# Altium PCB SUPERPID.PcbDoc
Units mil, origin at the board's own origin, x right, y up, seen from the top; angles counter-clockwise.
Board outline 3937.01 x 3543.31 mil, 2 copper layers (Top Layer, Bottom Layer), stack 62.249 mil thick; 50 components, 47 nets, 184 pads, 22 vias.
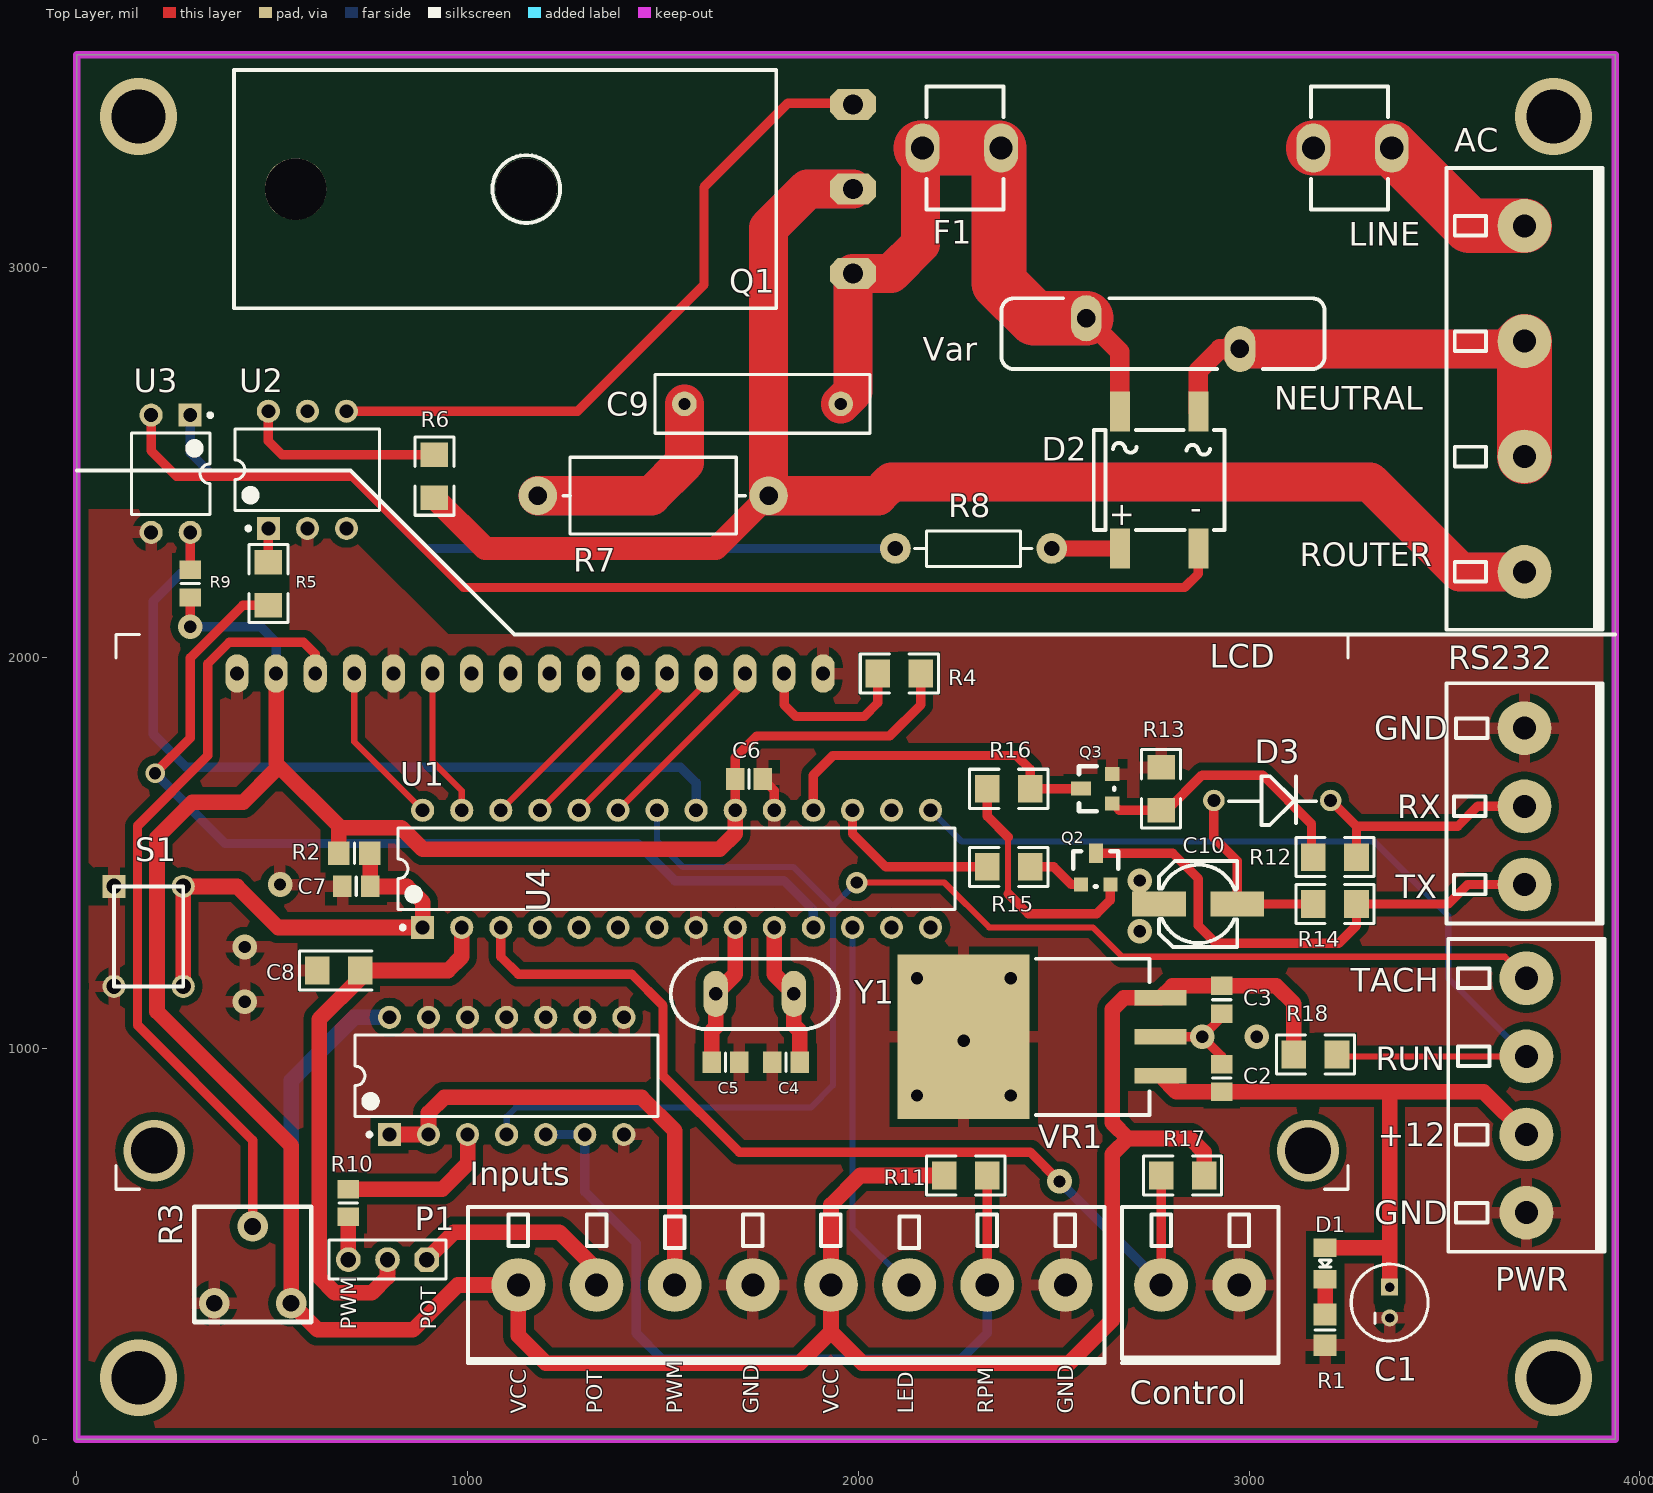
[diagram p0: Top Layer view]
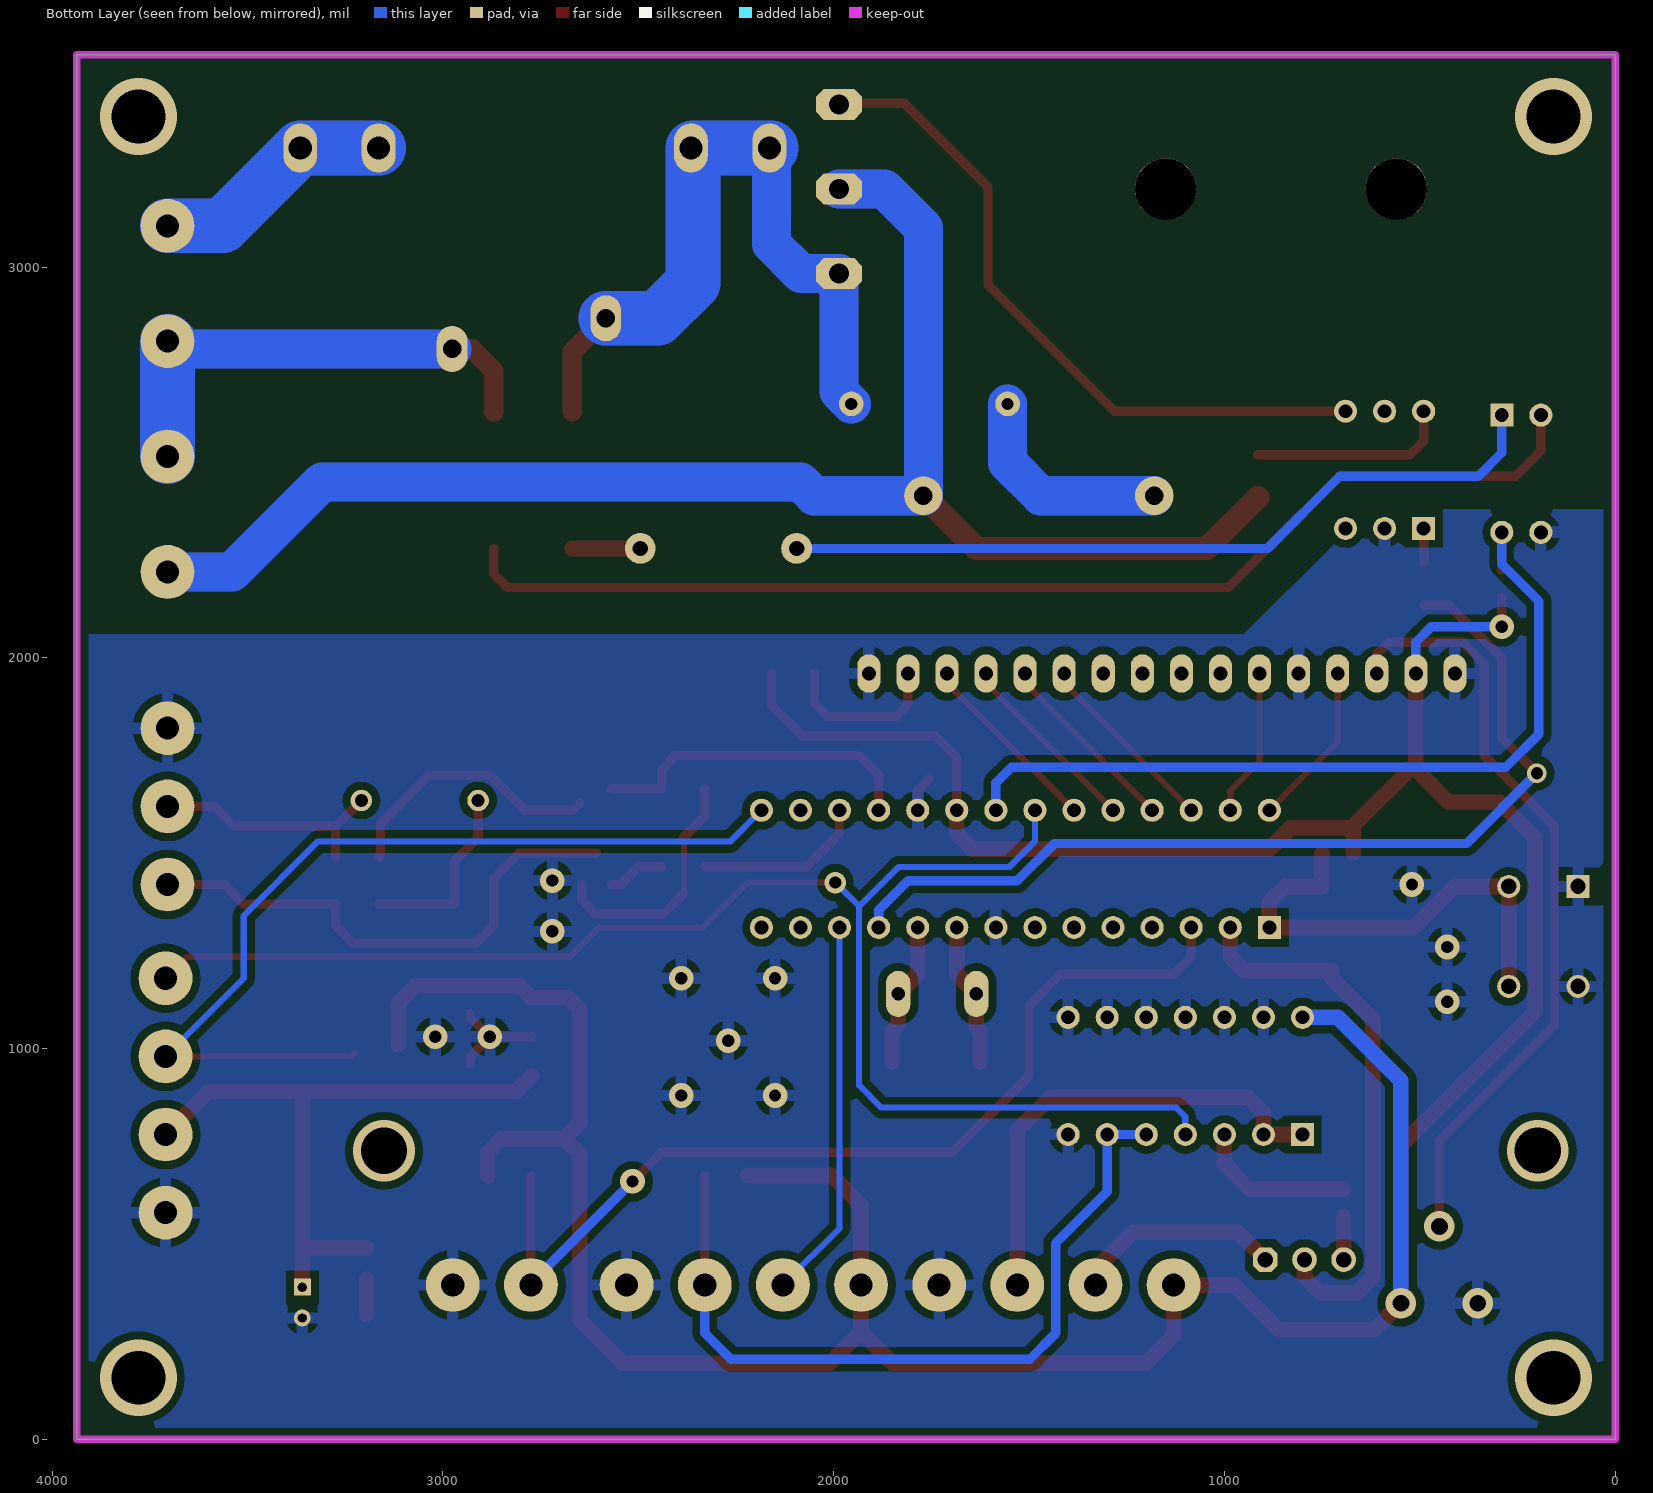
[diagram p1: Bottom Layer view, seen from below]

## Layer stack, top to bottom
Top Layer: signal copper 1.4
Dielectric: core 59.4488, FR-4, Dk 4.8
Bottom Layer: signal copper 1.4

## Board outline
0,0 0,3543.31 3937.01,3543.31 3937.01,0

## Design rules (kind name [scope] priority, off if disabled: settings)
Clearance POL [InPolygon] p1: gap=20
Clearance [All] p2: gap=10
PolygonConnect [All] p1: connectstyle=Relief reliefconductorwidth=30 reliefentries=4 polygonreliefangle="90 Angle"
RoutingVias [All] p1: holewidth=39.37 width=62.99 viastyle="Through Hole" minholewidth=31.5 minwidth=47.24 maxholewidth=47.24 maxwidth=78.74
SilkscreenOverComponentPads [All] p1: minsilkscreentomaskgap=10
SolderMaskExpansion [All] p1: expansion=4
Width [All] p1: maxlimit=140 minlimit=16 preferedwidth=24 minimp=50.000000 maximp=50.000000 favimp=50.000000
27 further rules are at their usual default settings.

## Classes and differential pairs
component class SUPERPID: C1 C2 C3 C4 C5 C6 C7 C8 C10 Control D1 D3 Inputs LCD P1 PWR Q2 Q3 R1 R2 R3 R4 R10 R11 R12 R13 R14 R15 R16 R17 R18 RS232 S1 U1 U4 VR1 Y1
component class POTENCIA: AC C9 D2 F1 Q1 R5 R6 R7 R8 R9 U2 U3 Var

## Components (designator, comment, footprint, x,y, rotation, side; value= is the part's Value field where it differs from the comment)
AC "Block 4" BOR-4-7.5 3705,2220 r90 top
C1 "100uF" "RADIAL CAPACITOR - 100uF - 10V" 3360,350 r90 top
C2 "100nF" 6-0805_N 2930,925 r90 top
C3 "100nF" 6-0805_N 2930,1125 r90 top
C4 "15pF" 6-0805_N 1815,965 r180 top
C5 "15pF" 6-0805_N 1660,965 r0 top
C6 "100nF" 6-0805_N 1720,1690 r0 top
C7 "100nF" 6-0805_N 715,1415 r180 top
C8 "10uF" CC3216-1206 670,1200 r180 top
C9 "100nF 400V" RAD-0.4 1755,2650 r180 top
C10 "Cap Pol1" "CONDENSADOR SMT" 2870,1370 r0 top
Control "Block 2" BOR-2 2875,395 r0 top
D1 "Red" "0805 LED RED" 3195,450 r270 top
D2 "Bridge1" DF1502S-T 2770,2455 r180 top
D3 "1N4148" Diodo 3060,1635 r0 top
F1 "10A" "FUSE HOLDER" 2765,3305 r0 top
Inputs "Block 8" BOR-8-5.08 1130,395 r0 top
LCD "LCD" "LCD 16X2" 100,640 r0 top
P1 "Jumper3" HDR1X3 895,460 r180 top
PWR "Block 4" BOR-4-5.08 3710,580 r90 top
Q1 "BTA41600B" "TOP3 SINKED" 1790,3200 r90 top
Q2 "2N2907" "SOT-23 - PNP" 2570,1420 r0 top
Q3 "2N2222" SOT-23 2610,1665 r90 top
R1 "2k" 6-0805_M 3195,280 r90 top
R2 "10k" 6-0805_M 710,1500 r180 top
R3 "10K" TRIMPOT 450,545 r0 top
R4 "330R" CR3216-1206 2105,1960 r0 top
R5 "330R" CR3216-1206 490,2190 r90 top
R6 "1k" CR3216-1206 915,2465 r270 top
R7 "39R 1W" "AXIAL- 1W" 1475,2415 r0 top
R8 "22k" AXIAL-0.4 2295,2280 r0 top
R9 "10K" 6-0805_N 290,2190 r270 top
R10 "10K" 6-0805_N 695,605 r270 top
R11 "22k" CR3216-1206 2275,675 r0 top
R12 "10K" CR3216-1206 3220,1490 r0 top
R13 "10K" CR3216-1206 2775,1665 r90 top
R14 "10K" CR3216-1206 3220,1370 r180 top
R15 "10K" CR3216-1206 2385,1465 r180 top
R16 "10K" CR3216-1206 2385,1665 r180 top
R17 "10K" CR3216-1206 2830,675 r0 top
R18 "10K" CR3216-1206 3170,985 r180 top
RS232 "Molex 3" BOR-3 3705,1420 r90 top
S1 "BUTTON" "Switch - Omron" 95,1415 r270 top
U1 "PIC18F2550-I/SP" SPDIP300-SP28 1535,1460 r90 top
U2 "MOC3021" DIP-6 590,2481.3 r90 top
U3 "Optoisolator1" DIP-4 240,2471.3 r270 top
U4 "CD4081BCN" N14A 1100,930 r90 top
Var "300V" S20K115 2780,2830 r270 top
VR1 "Volt Reg" TO263-3-TD 2545,1030 r90 top
Y1 "XTAL 20MHZ" XTAL-2 1635,1140 r0 top

## Footprints (in the part's own frame and the unit in brackets; to place one, negate y for a bottom-side part, rotate by r counter-clockwise, add the part's x,y. Pads: shape width x height; smd on the part's side, far side on the other; paste and mask are expansions set on the pad)
6-0805_M [mm] "Chip Resistor, Body 2.0x1.2mm, IPC Low Density"
  rect 1.4x1.5 smd: 1(-1,0) 2(1,0)
  silkscreen extent 0,-0.65 0,0.65, body extent -1.07,-0.7 1.07,0.7, height 0.7
6-0805_N [mm] "Chip Resistor, Body 2.0x1.2mm, IPC Medium Density"
  rect 1.2x1.4 smd: 1(-0.9,0) 2(0.9,0)
  silkscreen extent 0,-0.6 0,0.6, body extent -1.07,-0.7 1.07,0.7, height 0.7
"0805 LED RED" [mm] "LED 0805 RED"
  rect 1.2x1.5 smd: 1(-1.016,0) 2(1.016,0)
  silkscreen extent -0.23,-0.38 0.23,0.38, body extent -1.01,-0.62 1.01,0.63, height 1.15
AXIAL-0.4 [mm] "Resistor; 2 Leads"
  round 2 hole 1: 1(-5.08,0) 2(5.08,0)
  silkscreen extent -3.84,-1.17 3.78,1.14, body extent -5.38,-1.14 5.38,1.17, height 2.93
"AXIAL- 1W" [mm] "Resistor; 2 Leads"
  round 2.5 hole 1.2: 1(-7.5,0) 2(7.5,0)
  silkscreen extent -5.84,-2.5 5.97,2.5, body extent -7.98,-2.21 7.72,2.29, height 4.75
BOR-2 [mm]
  round 3.5 hole 1.5: 1(-2.54,0) 2(2.54,0)
  silkscreen extent -5.08,-5.08 5.08,5.08, body extent -5.46,-3.81 5.04,3.89, height 10
BOR-3 [mm]
  round 3.5 hole 1.5: 1(0,0) 2(5.08,0) 3(10.16,0)
  silkscreen extent -2.54,-5.08 13.08,5.08, body extent -2.92,-3.81 12.58,3.89, height 10.05
BOR-4-5.08 [mm]
  round 3.5 hole 1.5: 1(0,0) 2(5.08,0) 3(10.16,0) 4(15.24,0)
  silkscreen extent -2.54,-5.08 17.78,5.08, body extent -3.1,-4.04 17.79,4.06, height 10
BOR-4-7.5 [mm]
  round 3.5 hole 1.5: 1(0,0) 2(7.5,0) 3(15,0) 4(22.5,0)
  silkscreen extent -3.76,-5.08 26.25,5.08, body extent -3.76,-4.5 26.24,4.5, height 13.65
BOR-8-5.08 [mm]
  round 3.5 hole 1.5: 1(0,0) 2(5.08,0) 3(10.16,0) 4(15.24,0) 5(20.32,0) 6(25.4,0) 7(30.48,0) 8(35.56,0)
  silkscreen extent -3.28,-5.08 38.1,5.08, body extent -3.29,-4.59 38.09,5.21, height 14.2
CC3216-1206 [mm] "Chip Capacitor; Body 3.2 x 1.6 mm (LxW typ)"
  rect 1.6x1.8 smd: 1(-1.4,0) 2(1.4,0)
  silkscreen extent -2.16,-1.27 2.54,1.27, body extent -2.16,-0.89 2.04,0.91, height 0.95
"CONDENSADOR SMT" [mm]
  rect 3.5x1.626 smd: 1(-2.54,0) 2(2.54,0)
  silkscreen extent -2.54,-2.79 2.54,2.79, body extent -3.56,-3.17 3.44,3.43, height 5.4
CR3216-1206 [mm] "Chip Resistor; Body 3.2 x 1.6 mm (LxW typ)"
  rect 1.6x1.8 smd: 1(-1.4,0) 2(1.4,0)
  silkscreen extent -2.54,-1.27 2.54,1.27, body extent -1.6,-0.76 1.6,0.84, height 1
DF1502S-T [mm]
  rect 1.3x2.6 smd: 1(2.55,4.45) 2(-2.55,-4.45) 3(-2.55,4.45) 4(2.55,-4.45)
  silkscreen extent -4.25,-3.25 4.25,3.25, body extent -4.28,-4.77 4.22,5.23, height 3.63
Diodo [mm] "Axial Device, Thru-Hole; 2 Leads; 0.4 in Pin Spacing"
  round 1.4 hole 0.85: 1(-3.81,0) 2(3.785,0)
  silkscreen extent -2.82,-1.6 2.82,1.57, body extent -4.22,-1.37 4.19,1.3, height 2.83
DIP-4 [mm] "DIP; 4 Leads; Row Spacing 7.62 mm; Pitch 2.54 mm"
  rect 1.5x1.5 hole 0.9: 1(-3.81,1.27)
  round 1.5 hole 0.9: 2(-3.81,-1.27) 3(3.81,-1.27) 4(3.81,1.27)
  silkscreen extent -3.93,-2.55 2.65,2.7, body extent -4,-2.74 4,2.8, height 4.31
DIP-6 [mm] "DIP; 6 Leads; Row Spacing 7.62 mm; Pitch 2.54 mm"
  rect 1.5x1.5 hole 0.9: 1(-3.81,2.54)
  round 1.5 hole 0.9: 2(-3.81,0) 3(-3.81,-2.54) 4(3.81,-2.54) 5(3.81,0) 6(3.81,2.54)
  silkscreen extent -3.93,-4.7 2.65,4.7, body extent -4,-4.04 4,4.04, height 4.31
"FUSE HOLDER" [mm]
  oval 2.2x3.2 hole 1.5: 1(-15.248,0) 1(-10.152,0) 2(10.152,0) 2(15.248,0)
  silkscreen extent -15,-4 15,4, body extent -15.44,-2.95 15.44,2.95, height 8.84
HDR1X3 [mm]
  oct 1.6x1.6 hole 1: 1(0,0)
  round 1.6 hole 1: 2(2.54,0) 3(5.08,0)
  silkscreen extent -1.27,-1.27 6.35,1.27, body extent -1.21,-1.24 6.29,1.26, height 16.31
"LCD 16X2" [mm]
  oval 1.5x2.5 hole 0.9: 1(7.874,33.528) 2(10.414,33.528) 3(12.954,33.528) 4(15.494,33.528) 5(18.034,33.528) 6(20.574,33.528) 7(23.114,33.528) 8(25.654,33.528) 9(28.194,33.528) 10(30.734,33.528) 11(33.274,33.528) 12(35.814,33.528) 13(38.354,33.528) 14(40.894,33.528) 15(43.434,33.528) 16(45.974,33.528)
  silkscreen extent 0,0 80.09,36.07, body extent -0.13,0.03 79.87,36.03, height 20.85
N14A [mm] "DIP, 14-Leads, Row Spacing 7.62mm, Pitch 2.54mm, Body 19.18x6.35mm"
  rect 1.5x1.5 hole 0.9: 1(-3.81,7.62)
  round 1.5 hole 0.9: 2(-3.81,5.08) 3(-3.81,2.54) 4(-3.81,0) 5(-3.81,-2.54) 6(-3.81,-5.08) 7(-3.81,-7.62) 8(3.81,-7.62) 9(3.81,-5.08) 10(3.81,-2.54) 11(3.81,0) 12(3.81,2.54) 13(3.81,5.08) 14(3.81,7.62)
  silkscreen extent -3.93,-9.85 2.65,9.85, body extent -3.55,-9.85 3.55,9.85, height 5.08
RAD-0.4 [mm] "Radial Cap, Thru-Hole; 2 Leads; 0.4 in Pin Spacing"
  round 1.6 hole 0.8: 1(-5.08,0) 2(5.08,0)
  silkscreen extent -6.98,-1.91 6.98,1.91
"RADIAL CAPACITOR - 100uF - 10V" [mm]
  rect 1.1x1.1 hole 0.6: 1(1,0)
  round 1.1 hole 0.6: 2(-1,0)
  silkscreen extent -2.5,-2.5 2.5,2.5, body extent -2.5,-2.5 2.5,2.5, height 11
S20K115 [mm] "SIOV metal oxide varistors  Leaded varistors, StandarD series"
  oval 3x2 hole 1.2: 1(-1,-5) 2(1,5)
  silkscreen extent -2.3,-10.5 2.3,10.5, body extent -1.75,-10 1.75,10, height 24.75
SOT-23 [mil]
  rect 36x36 smd: B(-37.5,-40) E(37.5,-40)
  rect 36x50 smd: C(0.5,40)
  silkscreen extent -58,-45 58,45, body extent -57,-46 57,46, height 41
"SOT-23 - PNP" [mil]
  rect 36x36 smd: B(0,0) E(75,0)
  rect 36x50 smd: C(38,80)
  silkscreen extent -20,-5 95,85
SPDIP300-SP28 [mm] "DIP, 28-Leads, Row Spacing 7.62mm, Pitch 2.54mm, Body 34.9x6.8mm"
  rect 1.5x1.5 hole 0.9: 1(-3.81,16.51)
  round 1.5 hole 0.9: 2(-3.81,13.97) 3(-3.81,11.43) 4(-3.81,8.89) 5(-3.81,6.35) 6(-3.81,3.81) 7(-3.81,1.27) 8(-3.81,-1.27) 9(-3.81,-3.81) 10(-3.81,-6.35) 11(-3.81,-8.89) 12(-3.81,-11.43) 13(-3.81,-13.97) 14(-3.81,-16.51) 15(3.81,-16.51) 16(3.81,-13.97) 17(3.81,-11.43) 18(3.81,-8.89) 19(3.81,-6.35) 20(3.81,-3.81) 21(3.81,-1.27) 22(3.81,1.27) 23(3.81,3.81) 24(3.81,6.35) 25(3.81,8.89) 26(3.81,11.43) 27(3.81,13.97) 28(3.81,16.51)
  silkscreen extent -3.93,-18.1 2.65,18.1, body extent -3.55,-18.1 3.55,18.1, height 5.08
"Switch - Omron" [mm]
  rect 1.5x1.5 hole 1: 1(0,0)
  round 1.5 hole 1: 1(6.5,0) 2(0,4.5) 2(6.5,4.5)
  silkscreen extent 0,0 6.5,4.5, body extent -0.93,-0.76 7.28,5.24, height 9.5
TO263-3-TD [mm]
  rect 1x3.4 smd: 1(-2.54,-5.8) 2(0,-5.8) 3(2.54,-5.8)
  rect 10.7x8.6 smd: 2(0,7)
  silkscreen extent -5.08,-5.08 5.08,2.29, body extent -5,-4.99 5,10.68, height 4.88
"TOP3 SINKED" [mm]
  round 4 hole 4: 0(0,31.25) 0(0,16.25)
  oct 2x3 hole 1.3: 1(-5.5,-5) 2(0,-5) 3(5.5,-5)
  silkscreen extent -7.75,0 7.75,35.25, body extent -8,-5.35 32,35.27, height 7.68
TRIMPOT [mm]
  round 2 hole 1.1: 1(-2.5,-5) 2(2.5,-5) 3(0,0)
  silkscreen extent -3.81,-6.22 3.81,1.27, body extent -3.3,-5.84 3.3,0.76, height 1
XTAL-2 [mil]
  oval 62x118.11 hole 35: 1(0,0) 2(200,0)
  silkscreen extent -115,-90 315,90, body extent -122,-90 324,93, height 138

## Part data
AC PWR: library part "Header 4", "Header, 4-Pin"
C1: library part "Cap Pol1", "Polarized Capacitor (Radial)"
C2 C3 C4 C5 C6 C7 C8: library part "Cap Semi", "Capacitor 0805"
C9: library part Cap, "Capacitor"
C10: "Polarized Capacitor (Radial)"
Control: library part "Header 2", "Header, 2-Pin"
D1: library part LED3, "Typical BLUE SiC LED"
D2: "Full Wave Diode Bridge"
D3: library part "Diode 1N4007", "1 Amp General Purpose Rectifier"
F1: library part "Fuse 1", "Fuse"
Inputs: library part "Header 8", "Header, 8-Pin"
LCD: library part "LCD 16*2", "HD44780 parallel interface chipset"
P1 RS232: library part "Header 3", "Header, 3-Pin"
Q1: library part Triac, "Silicon Bidirectional Triode Thyristor"
Q2: library part PNP, "PNP Bipolar Transistor"
Q3: library part NPN, "NPN Bipolar Transistor"
R1 R2 R4: library part Res1, "Chip Resistor 1206"
R3: library part RPot, "Potentiometer"
R5 R6 R7 R8 R9 R10 R11 R12 R13 R14 R15 R16 R17 R18: library part Res1, "Resistor"
U1: "High Performance, Enhanced Flash, USB Microcontroller with nanoWatt Technology, 32K Flash, 28-Pin SPDIP, Industrial Temperature Range"
U3: "4-Pin Phototransistor Optocoupler"
U4: "Quad 2-Input AND Buffered B series Gate, 14-Pin PDIP"
Var: library part "Res Varistor", "Varistor (Voltage-Sensitive Resistor)"
VR1: "Voltage Regulator"
Y1: library part XTAL, "Crystal Oscillator"

## Via types
v1: diameter 62.99, hole 31.5, Top Layer to Bottom Layer, 14 vias
v2: diameter 196.85, hole 137.8, Top Layer to Bottom Layer, 4 vias
v3: diameter 157.48, hole 118.11, Top Layer to Bottom Layer, 2 vias
v4: diameter 55.12, hole 31.5, Top Layer to Bottom Layer, 1 vias
v5: diameter 50, hole 31.5, Top Layer to Bottom Layer, 1 vias

## Nets (pads, with @x,y where several pads share a name; then routed paths per layer and width w, separated by ;. In a path a pad name is that pad's centre, name@x,y a point inside that pad or via, vN(x,y) a via of type N, cw(c..) or ccw(c..) an arc to the next point about the centre after c; other vN are vias at no path point)
+12V: C1.1 C2.1 D1.1 PWR.2 VR1.1 | length 1666.1
  Top Layer w40: VR1.1 2813.78,889.57 C2.1 3355,889.57 ; D1.1 3360,490 ; C1.1 3360,490 ; PWR.2 3600.43,889.57 3355,889.57 ; 3355,889.57 3360,884.57 3360,490
D4: LCD.11 U1.26 | length 484.6
  Top Layer w16: U1.26 1410,1935 LCD.11
D5: LCD.12 U1.25 | length 484.6
  Top Layer w16: U1.25 1510,1935 LCD.12
D6: LCD.13 U1.24 | length 484.6
  Top Layer w16: U1.24 1610,1935 LCD.13
D7: LCD.14 U1.23 | length 484.6
  Top Layer w16: U1.23 1710,1935 LCD.14
DIMMER: AC.1 Q1.2 R6.2 R7.2 | length 6870.5
  Top Layer w60: R6.2 1044.88,2280 1635.28,2280 R7.2
  Top Layer w80: R7.2@1770,2415.28 R7.2
  Top Layer w100: R7.2@1770,2415.28 1770,3100 1870,3200 Q1.2 ; R7.2 2050,2415 2085,2450 3310,2450 3540,2220 AC.1@3670,2220
  Bottom Layer w100: Q1.2 1870,3200 1770.28,3100.28 R7.2 2050,2415 2085,2450 3310,2450 3540,2220 AC.1@3670,2220
E: LCD.6 U1.27 | length 381.1
  Top Layer w16: LCD.6 910,1735 985,1660 U1.27
GND: C1.2 C2.2 C3.1 C4.2 C5.2 C6.2 C7.2 C8.2 C10.1 Control.2 Inputs.4 Inputs.8 LCD.1 LCD.5 LCD.16 PWR.1 Q3.E R1.1 R3.1 R13.2 RS232.3 S1.1 U1.8 U1.19 U2.2 U3.3 U4.7 U4.8 U4.9 U4.10 U4.11 U4.12 U4.13 VR1.2 | length 369.5
  Top Layer w24: C6.2 1785,1660.43 U1.19 ; VR1.2@2773.35,1030 v1(2880,1030) ; C2.2 2930,980 v1(2880,1030) ; C3.1 2930,1080 v1(2880,1030)
  other v1: 2150,880 2390,880 2270,1020 3020,1030 430,1120 2150,1180 2390,1180 430,1260 2720,1300 520,1420 2720,1430
LED: Inputs.6 U1.12 | length 975.1
  Bottom Layer w16: U1.12 1985,540 Inputs.6
LINE: C9.1 D2.4 F1.1 Q1.1 Var.1 | length 3480.1
  Top Layer w50: Var.1 2669.61,2782.91 D2.4
  Top Layer w100: C9.1 1986.85,2681.85 Q1.1 2083.46,2983.46 2159.7,3059.7 F1.1@2159.7,3305
  Top Layer w140: F1.1@2159.7,3305 2360.3,3305 2360.3,2959.7 2450.63,2869.37 Var.1
  Bottom Layer w100: C9.1 1986.85,2681.85 Q1.1 2083.46,2983.46 2159.7,3059.7 F1.1@2159.7,3305
  Bottom Layer w140: F1.1@2159.7,3305 2360.3,3305 2360.3,2959.7 2450.63,2869.37 Var.1
NetAC_4: AC.4 F1.2 | length 1245.6
  Top Layer w140: F1.2@3164.7,3305 3365.3,3305 3564.47,3105.83 AC.4
  Bottom Layer w140: F1.2@3164.7,3305 3365.3,3305 3564.47,3105.83 AC.4
NetC8_1: C8.1 P1.2 U1.2 | length 1421.1
  Top Layer w40: 795,415 755,375 660,375 620,415 620,1075 725.12,1180.12 C8.1 950,1200 985,1235 U1.2 ; 795,425 P1.2
NetC9_2: C9.2 R7.1 | length 1121
  Top Layer w100: R7.1 1470,2415 1555,2500 C9.2
  Bottom Layer w100: R7.1 1470,2415 1555,2500 C9.2
NetC10_2: C10.2 D3.1 R14.2 | length 484.7
  Top Layer w24: D3.1 2910,1540 2970,1480 C10.2 R14.2
NetD1_2: D1.2 R1.2 | length 90.6
  Top Layer w40: R1.2 D1.2
NetD2_1: D2.1 R8.2 | length 174.4
  Top Layer w40: R8.2 D2.1@2669.41,2280
NetD2_3: D2.3 U3.2 | length 2995.7
  Top Layer w24: U3.2 190,2530 255,2465 705,2465 990,2180 2835,2180 2870.39,2215.39 D2.3
NetInputs_3: Inputs.3 U4.1 U4.2 | length 1231.8
  Top Layer w40: U4.1 U4.2 900,835 940,875 1445,875 1530,790 Inputs.3
NetInputs_7: Inputs.7 R11.2 U4.5 U4.6 | length 2019.8
  Top Layer w24: Inputs.7 2330,674.88 R11.2
  Bottom Layer w24: U4.5 U4.6 1300,634 1432,502 1432,271 1498,205 2263,205 2330,272 Inputs.7
NetLCD_3: LCD.3 R3.3 | length 1997
  Top Layer w24: R3.3 450,765 155,1060 155,1570 335,1750 335,1985 390,2040 580,2040 610,2010 LCD.3
NetLCD_15: LCD.15 R4.1 | length 421.9
  Top Layer w24: LCD.15 1810,1880 1840,1850 2015,1850 2049.88,1884.88 R4.1
NetQ1_3: Q1.3 U2.4 | length 1783.1
  Top Layer w24: U2.4 1281.3,2631.3 1605,2955 1605,3205 1820,3420 Q1.3@2000,3420
NetQ2_B: Q2.B R15.1 | length 148.5
  Top Layer w24: R15.1 2500,1465 2545,1420 Q2.B
NetQ2_E: Q2.E R16.2 | length 628
  Top Layer w16: 2383.38,1396.62 2383.38,1541.62
  Top Layer w24: R16.2 2329.88,1595.12 2383.38,1541.62 ; 2383.38,1396.62 2435,1345 2610,1345 2645,1380 Q2.E
NetQ3_B: Q3.B R12.1 R13.1 | length 693.5
  Top Layer w24: Q3.B 2667.62,1609.88 R13.1 R13.1@2789.88,1609.88 ; R13.1@2790,1609.88 R13.1@2789.88,1609.88 ; R12.1 3159.88,1495 3159.88,1575.12 3035,1700 2880,1700 R13.1@2789.88,1609.88
NetR5_2: R5.2 U2.1 | length 86.2
  Top Layer w24: R5.2 U2.1
NetR6_1: R6.1 U2.6 | length 515.7
  Top Layer w24: U2.6 490,2555 524.88,2520.12 R6.1
NetR8_1: R8.1 U3.1 | length 2002.8
  Bottom Layer w24: U3.1 290,2525 350,2465 705,2465 890,2280 R8.1
NetR10_1: R10.1 U4.3 | length 406.7
  Top Layer w40: R10.1 935.43,640.43 1000,705 U4.3
NEUTRAL: AC.2 AC.3 D2.2 Var.2 | length 2297.9
  Top Layer w50: D2.2 2870.39,2735.39 2925.63,2790.63 Var.2
  Top Layer w100: Var.2 AC.3@3685.08,2790.63
  Top Layer w140: AC.3@3685.08,2790.63 AC.3 AC.2
  Bottom Layer w100: Var.2 AC.3@3685.08,2790.63
  Bottom Layer w140: AC.3@3685.08,2790.63 AC.3 AC.2
O/C: Control.1 R17.1 U1.3 | length 2501.4
  Top Layer w24: U1.3 1085,1235 1130,1190 1420,1190 1500,1110 1500,930 1695,735 2440,735 v1(2515,660) ; R17.1 2775,674.88 Control.1
  Bottom Layer w24: v1(2515,660) 2775,400 Control.1
OSC1: C5.1 U1.9 Y1.1 | length 370
  Top Layer w40: C5.1 1624.57,1044.57 1635,1055 Y1.1 1685,1190 U1.9
OSC2: C4.1 U1.10 Y1.2 | length 372.1
  Top Layer w40: U1.10 1785,1190 Y1.2 1835,1060 1850.43,1044.57 C4.1
POT: Inputs.2 P1.1 | length 543.3
  Top Layer w40: P1.1 965,530 1235,530 1330,435 Inputs.2
PWM: P1.3 R10.2 | length 109.6
  Top Layer w40: P1.3 R10.2
RPM: PWR.4 U1.22 U4.4 | length 3872.6
  Top Layer w16: v4(1996,1425) 2220,1425 2335,1310 2600,1310 2675,1235 3655,1235 PWR.4
  Bottom Layer w16: U4.4 1100,826 1123,849 1878,849 1935,906 1935,1364 ; U1.22 1485,1530 1550,1465 1834,1465 1935,1364 ; v4(1996,1425) 1935,1364
RS: LCD.4 U1.28 | length 422.5
  Top Layer w16: LCD.4 710,1785 U1.28
RUN: PWR.3 R18.1 U1.15 | length 2368.7
  Top Layer w16: R18.1@3225.12,990 3235.12,980 PWR.3
  Bottom Layer w16: U1.15 2265,1530 3320,1530 3510,1340 3510,1180 PWR.3
RXD: Q3.C R16.1 U1.18 | length 860.3
  Top Layer w24: U1.18 1885,1700 1935,1750 2405,1750 2440.12,1714.88 R16.1 2440.62,1665.5 Q3.C
RXH: D3.2 R12.2 RS232.2 | length 623.5
  Top Layer w24: D3.2 3275,1569 ; R12.2 3275,1490.12 3275,1569 ; RS232.2 3585,1620 3534,1569 3275,1569
TRIAC: R5.1 U1.11 | length 2462.5
  Top Layer w24: v5(200,1705) 290,1795 290,2000 424.88,2134.88 R5.1
  Bottom Layer w24: v5(200,1705) 380,1525 1435,1525 1530,1430 1809,1430 1885,1354 U1.11
TXD: R15.2 U1.17 | length 440.1
  Top Layer w24: U1.17 1985,1550 2070,1465 R15.2
TXH: Q2.C R14.1 RS232.1 | length 1356.8
  Top Layer w24: Q2.C 2805,1500 2870,1435 2870,1315 2915,1270 3230,1270 3275.12,1315.12 R14.1 3510,1370 3560,1420 RS232.1
VCC: C3.2 C6.1 Inputs.1 Inputs.5 LCD.2 R2.2 R3.2 R4.2 R9.2 R11.1 R17.2 R18.2 U1.20 U4.14 VR1.3 | length 10188.2
  Top Layer w16: C6.1 C6.1@1685,1689.57
  Top Layer w24: v1(290,2080) R9.2 ; C6.1 1684.57,1744.57 1740,1800 2080,1800 2160.12,1880.12 R4.2 ; U1.20 C6.1@1685,1689.57
  Top Layer w40: 510,1715 425,1630 295,1630 205,1540 205,1095 548.43,751.57 R3.2 616.57,280 860,280 975,395 Inputs.1 1130,265 1200,195 1850,195 1930,275 ; LCD.2 510,1730 670.63,1569.37 R2.2 ; 670.63,1554.37 681.26,1565 830,1565 885,1510 1645,1510 1685,1550 U1.20 ; R11.1 2005,675 1930,600 Inputs.5 1930,275 ; R17.2 2885.12,734.88 2850,770 2690,770 ; R18.2@3114.88,1010 3114.88,1115.12 3069.57,1160.43 C3.2 2803.78,1160.43 VR1.3 2680,1130 2650,1100 2650,810 2690,770 ; 1930,275 2010,195 2540,195 2650,305 2650,730 2690,770
  Bottom Layer w24: v1(290,2080) 470,2080 510,2040 LCD.2
  Bottom Layer w40: R3.2 548.43,918.43 710,1080 U4.14
VDD: 
VPP: C7.1 R2.1 S1.2 U1.1 | length 1213.8
  Top Layer w40: S1.2@272.17,1159.09 272.17,1415 410,1415 515,1310 U1.1 885,1375 845,1415 C7.1 750.43,1498.94 R2.1
ZC: R9.1 U1.21 U3.4 | length 2163.3
  Top Layer w24: R9.1 U3.4
  Bottom Layer w24: U3.4 290,2240 195,2145 195,1805 280,1720 1545,1720 1585,1680 U1.21
pads on no net: LCD.7 LCD.8 LCD.9 LCD.10 Q1.0 U1.4 U1.5 U1.6 U1.7 U1.13 U1.14 U1.16 U2.3 U2.5
copper on no net:
  other v2: 157.48,157.48 3779.53,157.48 157.48,3385.83 3779.53,3385.83
  other v3: 3151,738.5 198,739

## Polygon pours and split planes (outlines as drawn)
GND on Top Layer "Top Layer-GND" (solid, remove dead copper, pour order 4): 0,0 3937.01,0 3937.01,2060 950,2060 630,2380 0,2380 0,0
GND on Bottom Layer "Bottom Layer-GND" (solid, remove dead copper, pour order 3): 0,0 3937.01,0 3937.01,2060 950,2060 630,2380 0,2380 0,0

## Keep-outs
Keep-Out Layer:
  the board outline again, w19.68

## Silkscreen, mask and mechanical layers (free items; w line width, h text height)
Top Overlay:
  lines w10: 0,2480 700,2480 1120,2060 3937.01,2060
  text "LINE" at 3255,3055 h60
  text "NEUTRAL" at 3065,2635 h60
  text "ROUTER" at 3130,2235 h60
  text "GND" at 3320,1790 h60
  text "RX" at 3380,1590 h60
  text "TX" at 3375,1385 h60
  text "TACH" at 3260,1145 h60
  text "RUN" at 3325,945 h60
  text "+12" at 3330,750 h60
  text "GND" at 3320,550 h60
  text "PWM" at 715,280 h40 r90
  text "POT" at 920,280 h40 r90
  text "VCC" at 1150,65 h40 r90
  text "POT" at 1345,65 h40 r90
  text "PWM" at 1550,65 h40 r90
  text "GND" at 1745,65 h40 r90
  text "VCC" at 1950,65 h40 r90
  text "LED" at 2140,65 h40 r90
  text "RPM" at 2345,65 h40 r90
  text "GND" at 2550,65 h40 r90
Mechanical 1:
  the board outline again, w19.68

## Dimensions
3705,2220 to 3705,2515.28 on Mechanical 15
0,0 to 3937.01,0 on Mechanical 15
3937.01,0 to 3937.01,3543.31 on Mechanical 15

## Text inside footprints (layer, text, board x,y; h text height)
D2: Top Overlay "-" at 2850,2355 h60; Top Overlay "+" at 2650,2400 h60 r270